# Altium PCB FINAL_Walkie_Talkie_POWER_PCB.PcbDoc
Units mil, origin at the board's own origin, x right, y up, seen from the top; angles counter-clockwise.
Board outline 2080 x 2303.15 mil, 4 copper layers (Top Layer, Battery-, Battery+, Bottom Layer), stack 23.756 mil thick; 39 components, 28 nets, 149 pads, 43 vias.
Unrouted connection lines stored in the file: 20.
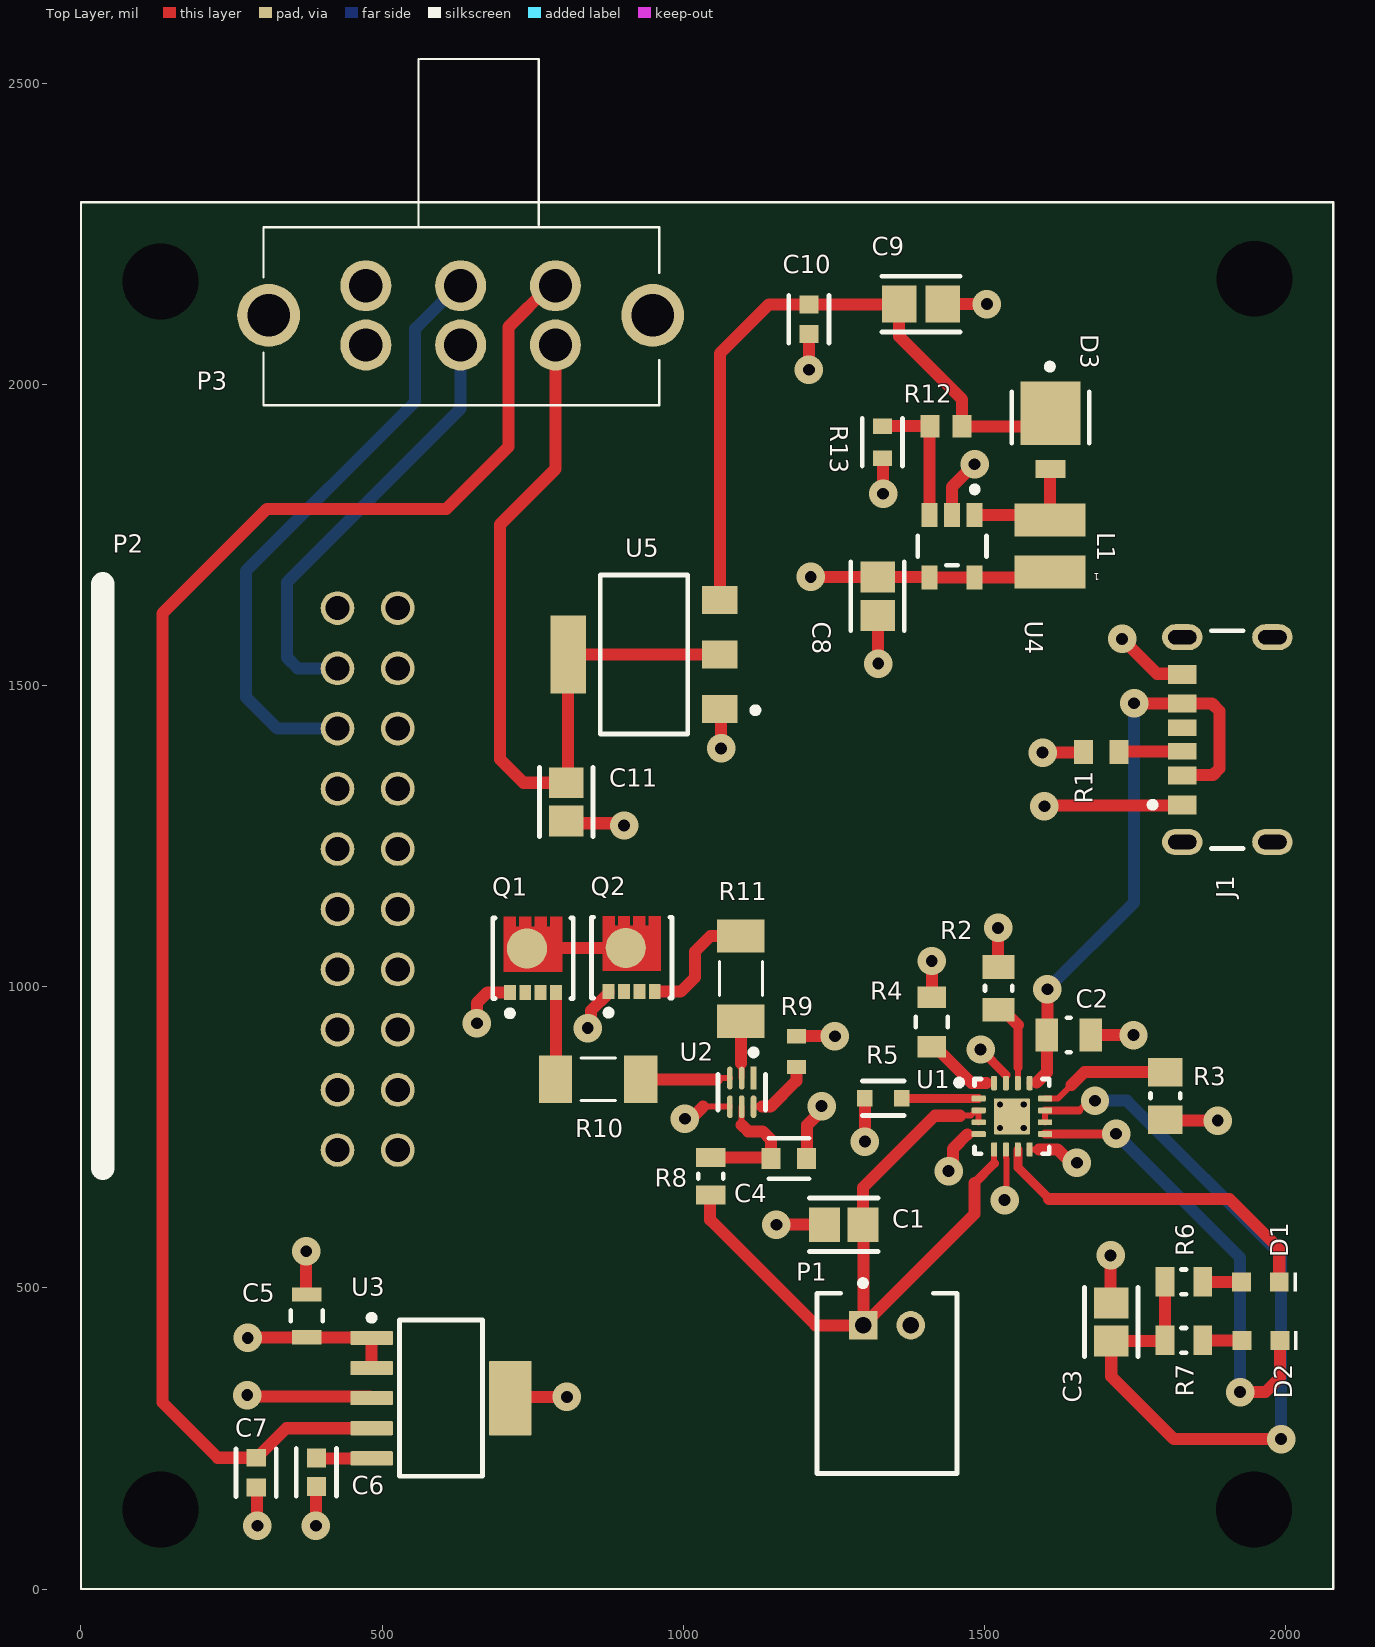
[diagram p0: Top Layer view]
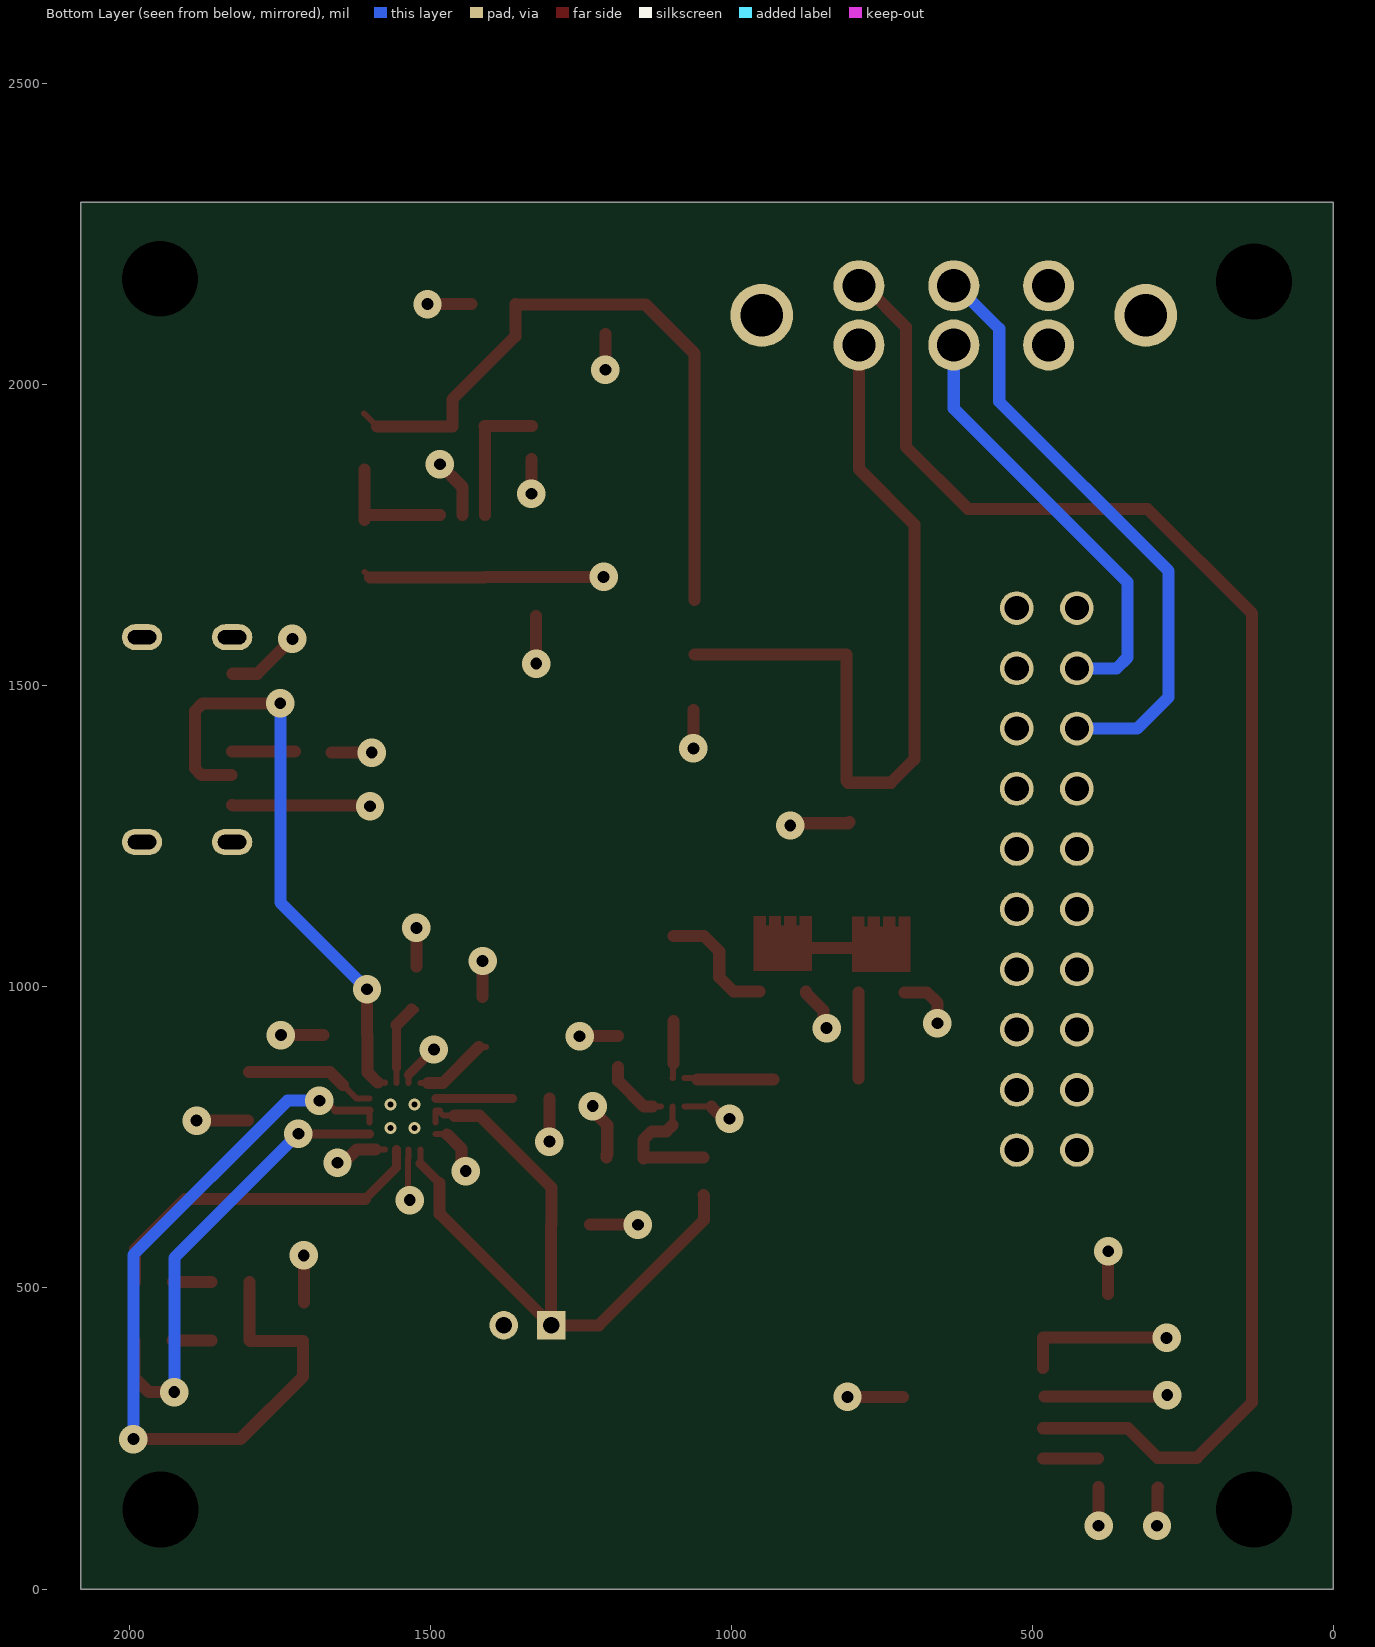
[diagram p1: Bottom Layer view, seen from below]
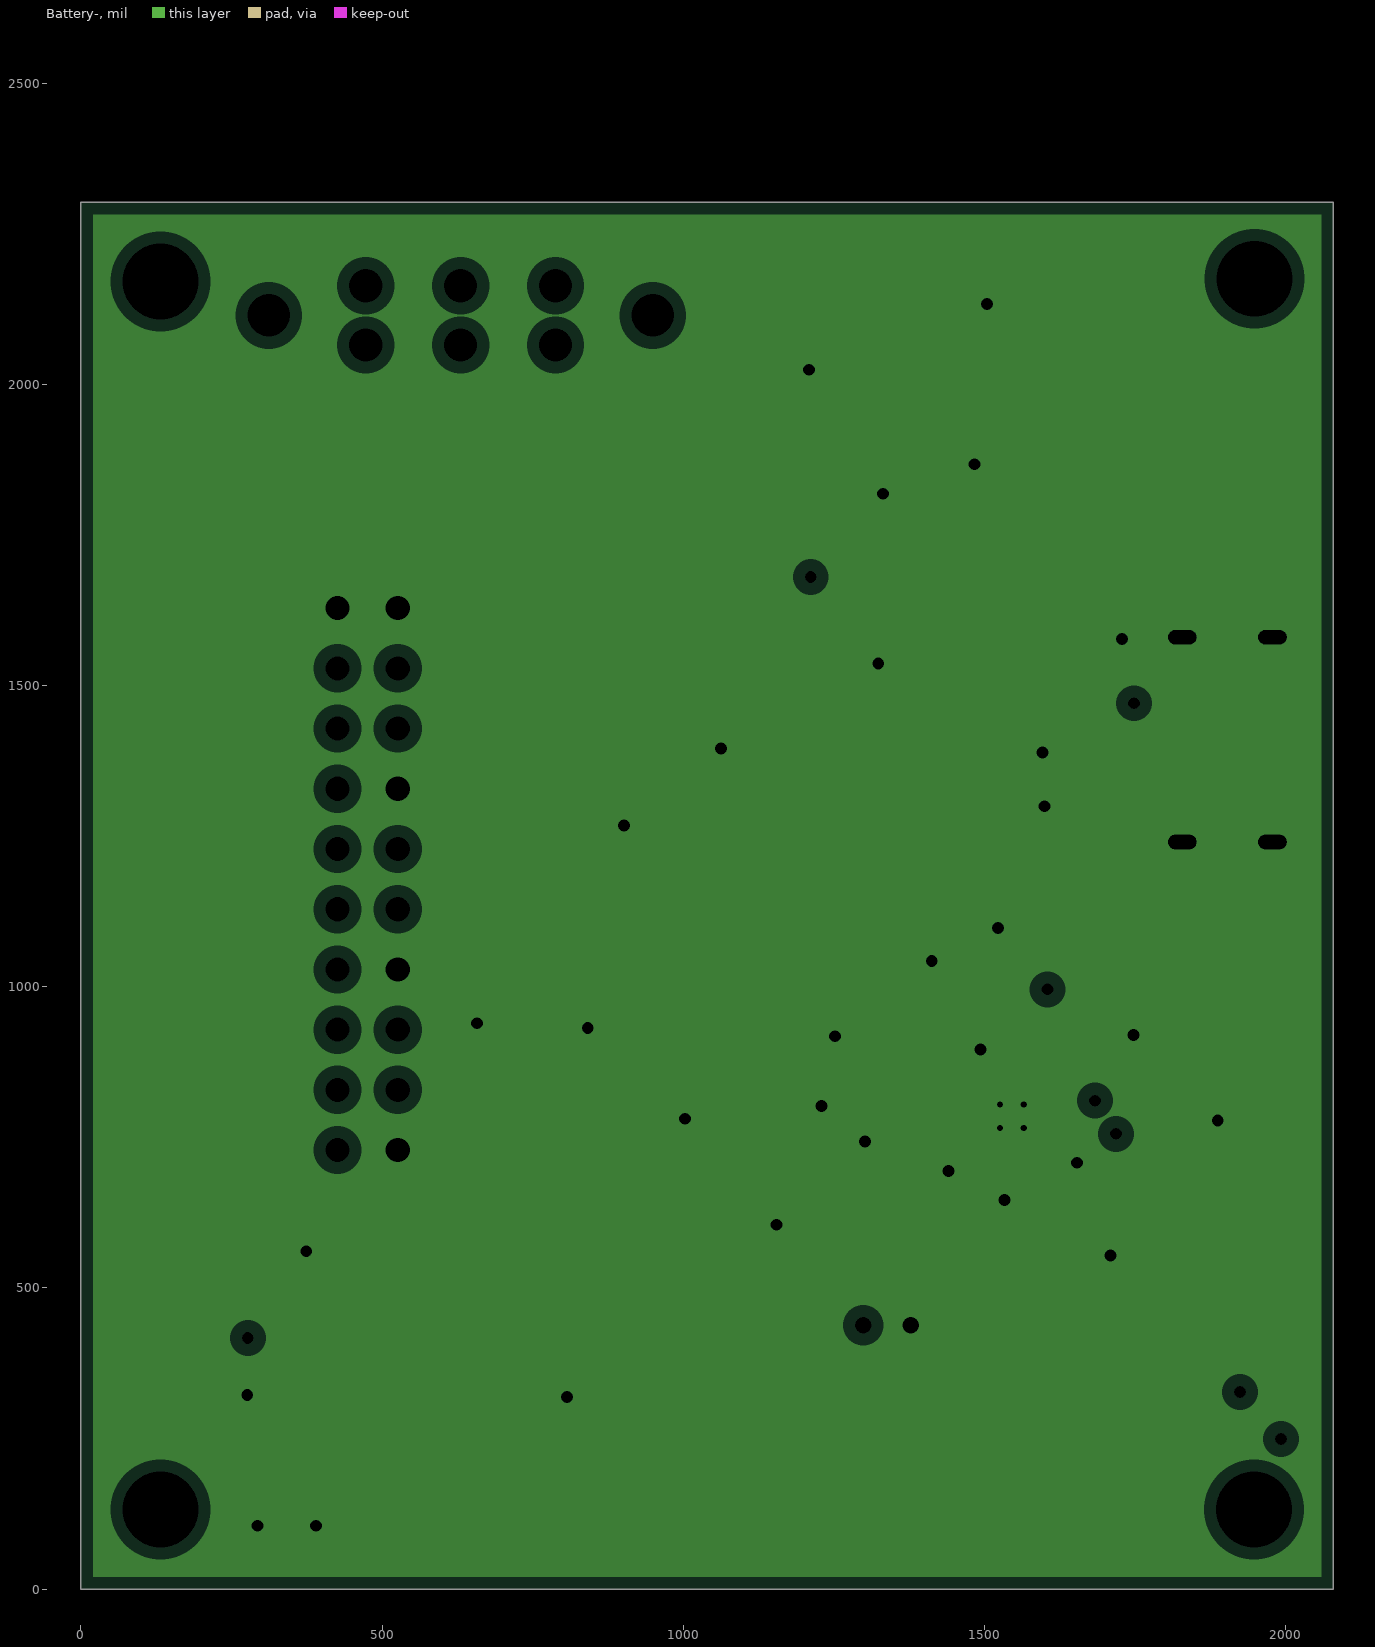
[diagram p2: Battery-, clearances drawn from the general rule]
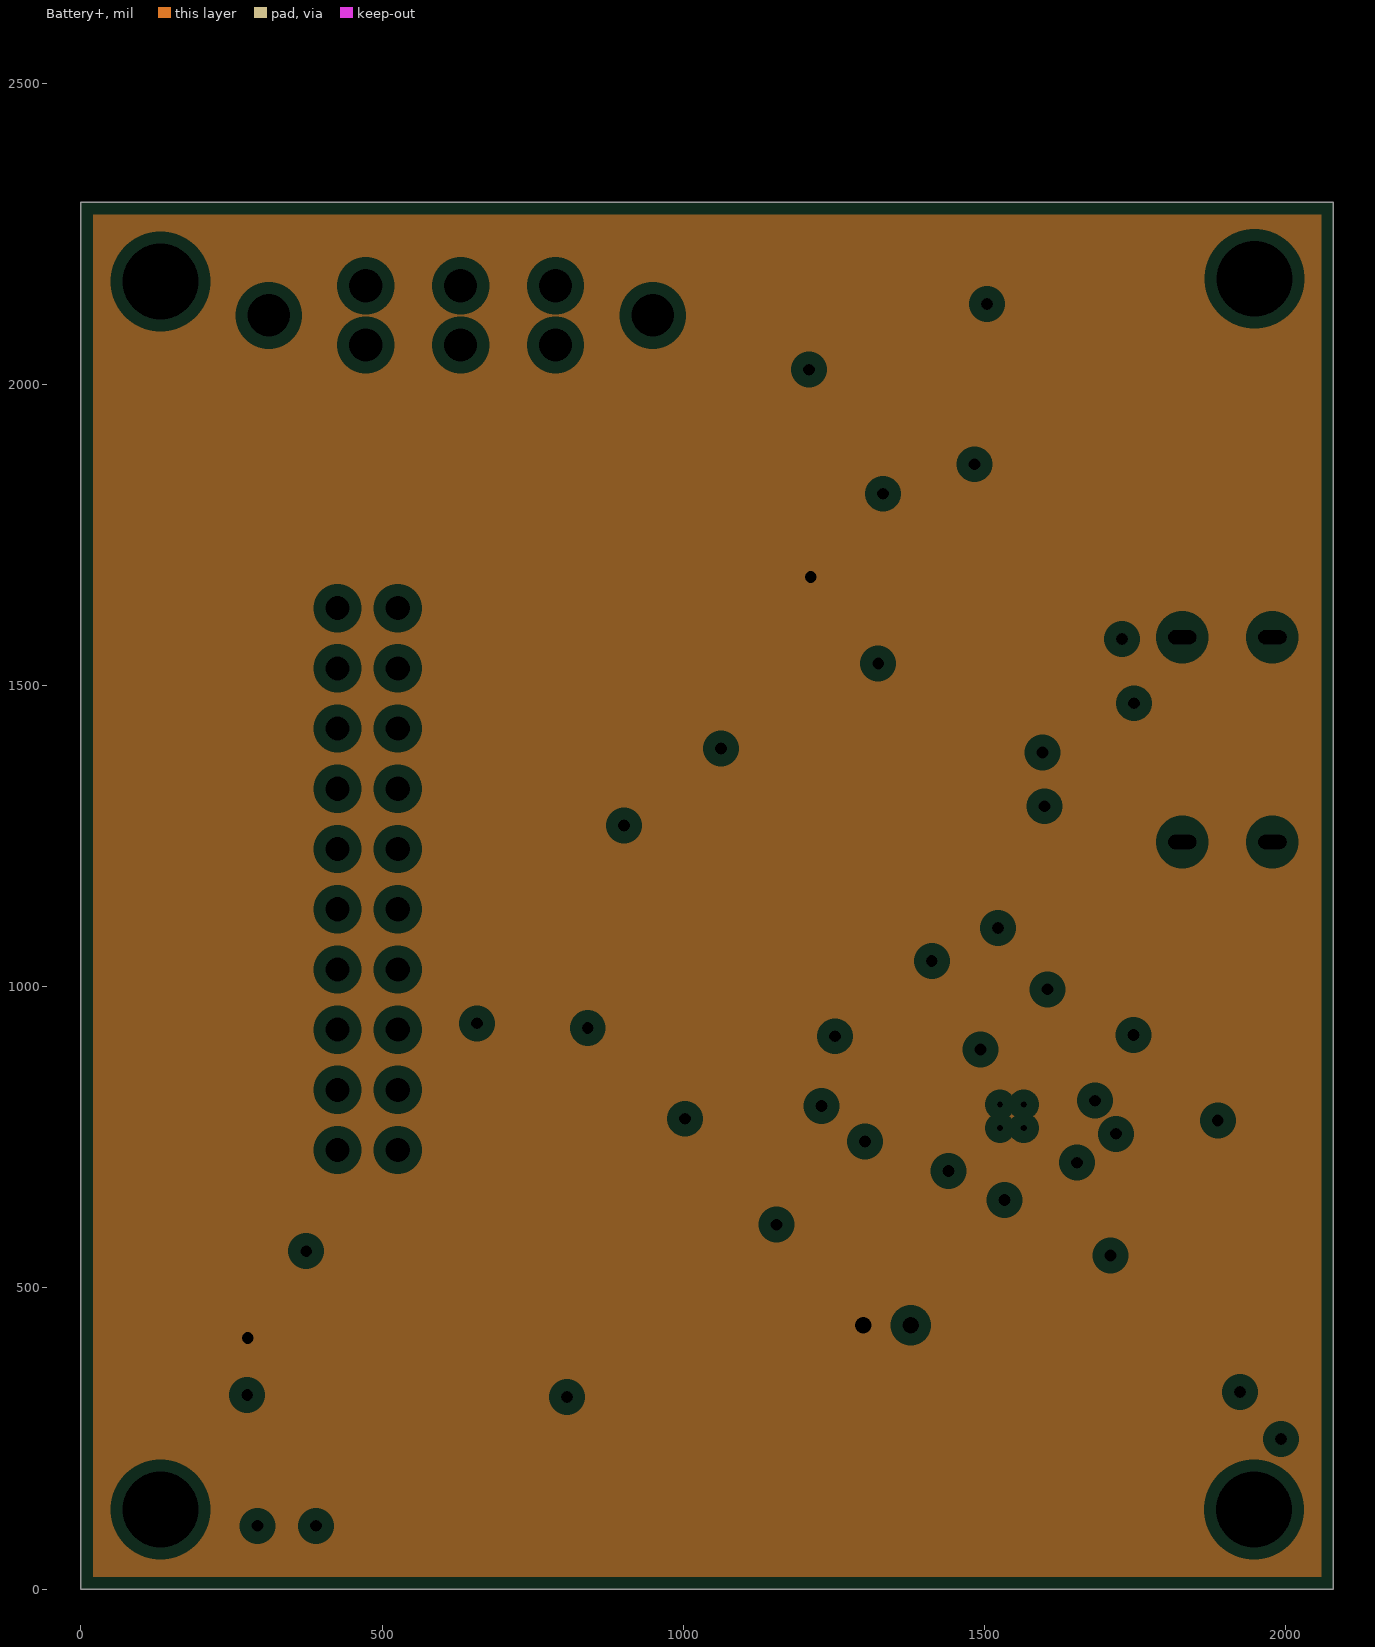
[diagram p3: Battery+, clearances drawn from the general rule]
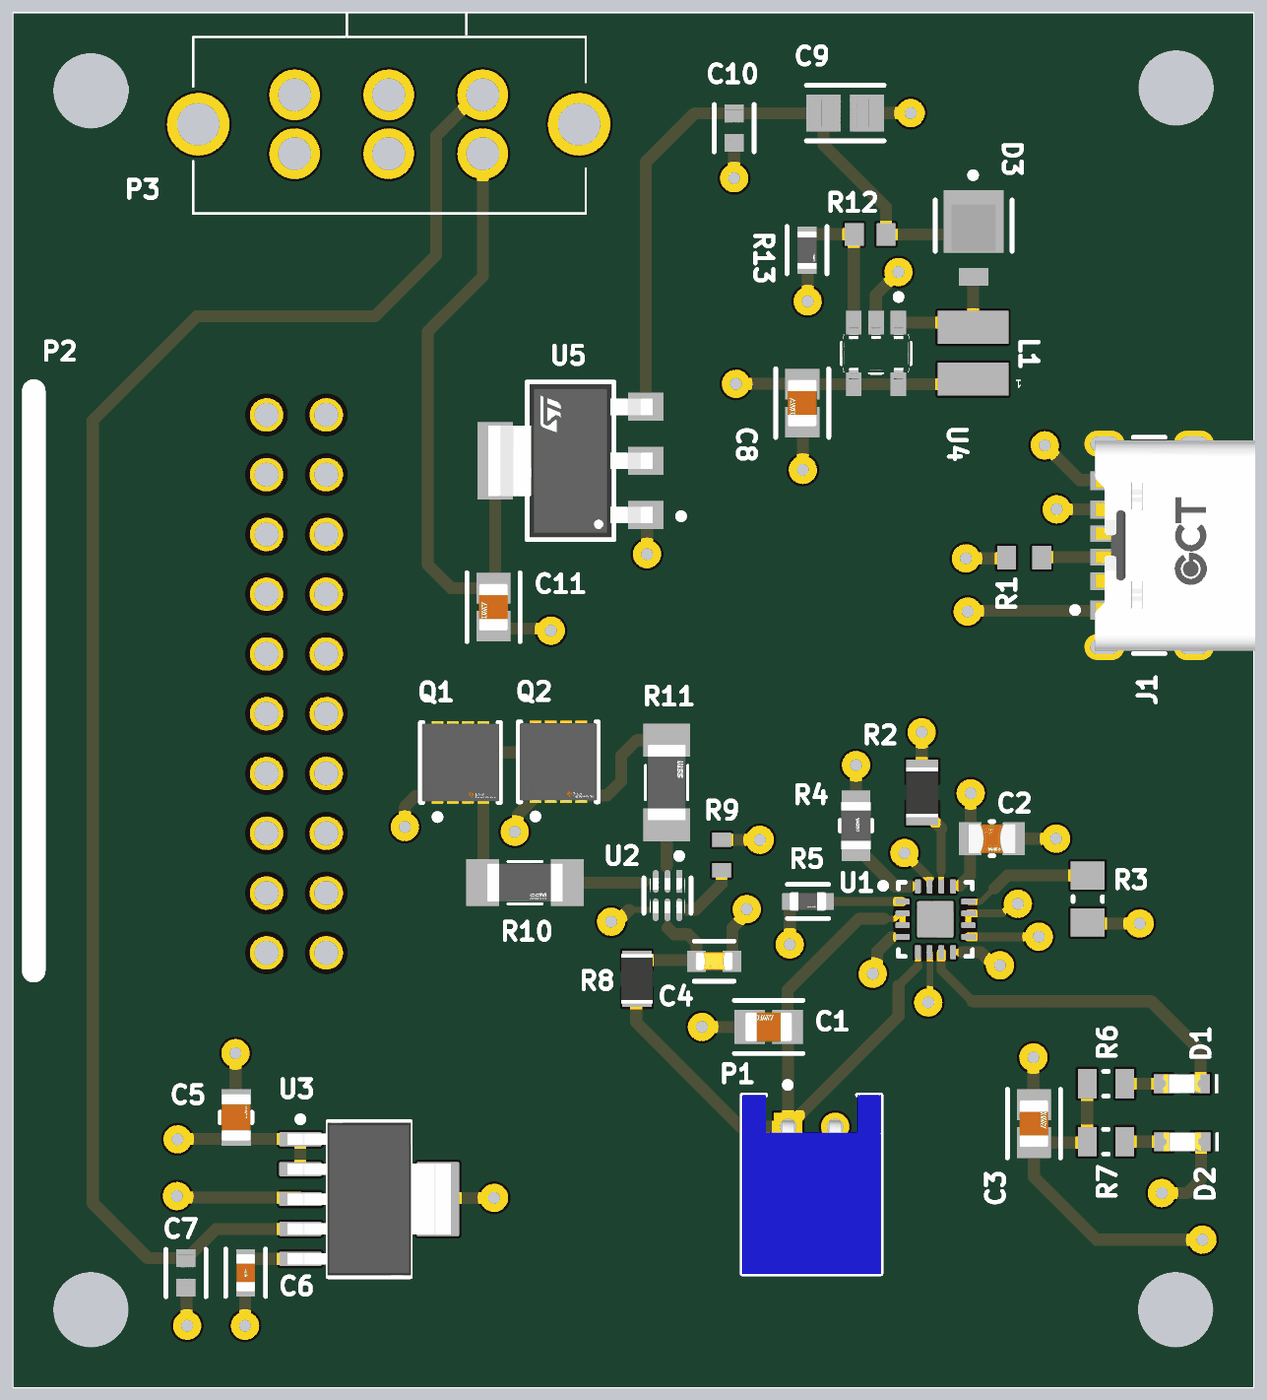
[diagram p4: 3D render of the assembled board from above, using the file's embedded part models]

## Layer stack, top to bottom
Top Solder: solder mask 0.4, Solder Resist, Dk 3.5
Top Layer: signal copper 1.4
Dielectric 2: prepreg 2.8, PP-006, Dk 4.1
Battery-: plane copper 1.378, net Battery-
Dielectric 1: dielectric 12.6, FR-4, Dk 4.8
Battery+: plane copper 1.378, net Battery+
Dielectric 3: prepreg 2.8, PP-006, Dk 4.1
Bottom Layer: signal copper 1.4
Bottom Solder: solder mask 0.4, Solder Resist, Dk 3.5

## Board outline
0,0 0,2303.15 2080,2303.15 2080,0

## Design rules (kind name [scope] priority, off if disabled: settings)
Clearance [All] p1: gap=5 ignorepadtopadclearanceinfootprint=FALSE
HoleSize [All] p1: absolutevalues=TRUE maxlimit=250 minlimit=10 maxpercent=80.000 minpercent=20.000
MinimumSolderMaskSliver [All] p1: minsoldermaskwidth=5
PlaneClearance [All] p1: clearance=20
PlaneConnect [All] p1: planeconnectstyle=Direct reliefexpansion=20 reliefentries=4 reliefconductorwidth=10 reliefairgap=10
PolygonConnect [All] p1: connectstyle=Relief reliefconductorwidth=10 reliefentries=4 polygonreliefangle="90 Angle" airgapwidth=10
RoutingVias [All] p1: holewidth=15 width=35 viastyle="Through Hole" minholewidth=10 minwidth=19 maxholewidth=28 maxwidth=50
SilkToSilkClearance [All] p1: silktosilkclearance=5
SilkToSolderMaskClearance [IsPad] p1: minsilkscreentomaskgap=5 clearancetoexposedcopper=TRUE
SolderMaskExpansion [All] p1: expansion=4 istentingtop=FALSE
SupplyNets "Schematic Supply Nets" [InNet('Battery-')] p1: voltage=0.000
Width [All] p1: maxlimit=1000 minlimit=5 preferedwidth=10
24 further rules are at their usual default settings.

## Components (designator, comment, footprint, x,y, rotation, side; value= is the part's Value field where it differs from the comment)
C1 "08056D475MAT2A" FP-0805-L_2_01_0_2-W_1_25-IPC_B 1266.72,605 r180 top
C2 "CC0805KKX7R7BB105" FP-CC0805-0_85-MFG 1640.58,920 r0 top value="1 uF"
C3 "08056D475MAT2A" FP-0805-L_2_01_0_2-W_1_25-IPC_B 1711,443.28 r90 top
C4 "CC0603KRX7R7BB104" FP-CC0603-DA-MFG 1175.53,715 r0 top value="100 nF"
C5 "GRM21BR61C106KE15K" FP-GRM21B-0_1-MFG 375,453.57 r90 top
C6 "0603B103K500CT" FP-0603B103K500CT-IPC_C 391,193.69 r270 top
C7 "CL10B105KP8NNNC" FP-CL10-IPC_C 291,193.32 r270 top
C8 "08056D475MAT2A" FP-0805-L_2_01_0_2-W_1_25-IPC_B 1323,1648.72 r270 top
C9 "CL21A226MQQNNNE" FP-CL21-IPC_A 1395,2134 r0 top
C10 "CL10B105KP8NNNC" FP-CL10-IPC_C 1209,2108.68 r270 top
C11 "08056D475MAT2A" FP-0805-L_2_01_0_2-W_1_25-IPC_B 806,1307.28 r270 top
D1 "150060GS75000" WL-SMCW_0603_150060xx75000 1958.5,510 r180 top
D2 "150060BS75000" WL-SMCW_0603_150060xx75000 1959.5,413 r180 top
D3 "MBRM140T3G" FP-457-04-MFG 1610,1940.51 r270 top
J1 "USB4125-GF-A-0190" FP-USB4125-GF-A-0190-MFG 1947.11,1410.68 r90 top
L1 "SDR0302-4R7ML" SDR0302-4R7ML 1609,1689 r180 top
P1 "S2B-PH-K-S(LF)(SN)" JST-S2B-PH-K-S_V 1338.63,341.54 r0 top
P2 "PH2RA-20-UA" PH2RA-20-UA 526,1629 r270 top
P3 "MFS201N-16-Z" MFS201N-16-Z 630.52,2066 r180 top
Q1 "CSD16406Q3" FP-DQG0008A-MFG 750.61,1047.5 r0 top
Q2 "CSD16406Q3" FP-DQG0008A-MFG 914.61,1048.5 r0 top
R1 "RC0603FR-075K1L" RESC1608X55X25ML10T15 1694.47,1390 r180 top
R2 "RC0805FR-0747KL" RESC2013X60X35NL10T20 1524,997.43 r270 top
R3 "RC0805FR-07887RL" RESC2013X60X35ML10T20 1801,819 r90 top
R4 "RC0805FR-07715RL" FP-RC0805-0_6-MFG 1413,941.66 r270 top
R5 "NCU18XH103F60RB" FP-NCU18-0_15-MFG 1332.49,815 r0 top
R6 "RC0805FR-071K5L" RESC2013X60X35LL10T20 1831.5,510 r180 top
R7 "RC0805FR-071K5L" RESC2013X60X35LL10T20 1831.5,413 r180 top
R8 "RC0805FR-07330RL" RESC2013X60X35LL10T20 1046,685.5 r270 top
R9 "RC0603FR-072K2L" RESC1608X55X25LL10T15 1188,892.59 r270 top
R10 "RG3216P-5004-B-T1" FP-RG3216-MFG 858.75,846.5 r0 top
R11 "RG3216P-5004-B-T1" FP-RG3216-MFG 1096,1013.87 r90 top
R12 "ERJ-3EKF3831V" RESC1608X55X30NL15T15 1436.57,1931 r0 top
R13 "RC0603FR-071KL" FP-RC0603-0_55-IPC_C 1331,1904.64 r270 top
U1 "BQ24072RGTR" BQ24072RGTR 1546,785 r180 top
U2 "BQ29700DSER" FP-DSE0006A-IPC_B 1097.32,824.76 r270 top
U3 "TPS79633DCQR" DCQ0006A_L 597.84,317 r0 top
U4 "MIC2288YD5-TR" FP-TSOT-5LD-PL-1-MFG 1446.6,1731.77 r270 top
U5 "LDL1117S50R" FP-SOT-223-0046067_14-MFG 935.02,1552 r180 top

## Footprints (in the part's own frame and the unit in brackets; to place one, negate y for a bottom-side part, rotate by r counter-clockwise, add the part's x,y. Pads: shape width x height; smd on the part's side, far side on the other; paste and mask are expansions set on the pad)
BQ24072RGTR [mm] "Battery Charger"
  rrect40% 0.6x0.25 smd: 1(1.4,-0.75) 2(1.4,-0.25) 3(1.4,0.25) 4(1.4,0.75) 9(-1.4,0.75) 10(-1.4,0.25) 11(-1.4,-0.25) 12(-1.4,-0.75)
  rrect40% 0.25x0.6 smd: 5(0.75,1.4) 6(0.25,1.4) 7(-0.25,1.4) 8(-0.75,1.4) 13(-0.75,-1.4) 14(-0.25,-1.4) 15(0.25,-1.4) 16(0.75,-1.4)
  rrect6% 1.522x1.522 smd paste-0.85: 17(0,0)
  rrect6% 1.55x1.55 on Top Paste: 17(0,0)
  silkscreen extent -1.57,-1.58 2.35,1.57, body extent -1.5,-1.5 1.5,1.5, height 1
DCQ0006A_L [mm] "SOT223, 6-Leads, Body 6.55x3.55mm, Pitch 1.27mm, IPC High Density"
  rrect17% 1.8x0.6 smd: 1(-2.925,2.54) 2(-2.925,1.27) 3(-2.925,0) 4(-2.925,-1.27) 5(-2.925,-2.54)
  rrect6% 1.8x3.15 smd: 6(2.925,0)
  silkscreen extent -3.05,-3.3 1.75,3.51, body extent -3.48,-3.25 3.48,3.25, height 1.64
FP-457-04-MFG [mm]
  rect 2.67x2.54 smd paste+0 mask+0: 1(-0.306,0)
  rect 0.762x1.27 smd paste+0 mask+0: 2(2.045,0)
  silkscreen extent -2.4,-1.64 0.96,1.64, body extent -1.74,-1.37 2.53,1.37, height 0.25
FP-0603B103K500CT-IPC_C [mil]
  rect 31.84x31.97 smd paste+0 mask+0: 1(-23.69,0) 2(23.69,0)
  silkscreen extent -40,-33 40,33, body extent -44,-22 44,22, height 10
FP-0805-L_2_01_0_2-W_1_25-IPC_B [mil]
  rect 51.36x57.33 smd paste+0 mask+0: 1(-31.72,0) 2(31.72,0)
  silkscreen extent -57,-44 57,44, body extent -67,-39 67,39, height 10
FP-CC0603-DA-MFG [mm]
  rect 0.8x0.9 smd paste+0 mask+0: 1(-0.75,0) 2(0.75,0)
  silkscreen extent -0.85,-0.85 0.85,0.85, body extent -1.35,-0.75 1.35,0.75, height 0.25
FP-CC0805-0_85-MFG [mm]
  rect 0.95x1.4 smd paste+0 mask+0: 1(-0.925,0) 2(0.925,0)
  silkscreen extent -0.08,-0.72 0.08,0.72, body extent -1.6,-1.05 1.6,1.05, height 0.25
FP-CL10-IPC_C [mil]
  rect 29.85x31.97 smd paste+0 mask+0: 1(-24.68,0) 2(24.68,0)
  silkscreen extent -40,-33 40,33, body extent -44,-22 44,22, height 10
FP-CL21-IPC_A [mil]
  rect 57.27x61.27 smd paste+0 mask+0: 1(-36.45,0) 2(36.45,0)
  silkscreen extent -65,-46 65,46, body extent -85,-50 85,50, height 10
FP-DQG0008A-MFG [mm]
  rect 0.5x0.63 smd paste-1000 mask+0: 1(-0.975,-1.435) 2(-0.325,-1.435) 3(0.325,-1.435) 4(0.975,-1.435)
  round 1.696 smd paste-1000 mask+0: 5-6-7-8(-0.25,0.415)
  Top Layer region: -1.225,-0.56 1.225,-0.56 1.225,1.75 0.725,1.75 0.725,1.34 0.575,1.34 0.575,1.75 0.075,1.75 0.075,1.34 -0.075,1.34 -0.075,1.75 -0.575,1.75 -0.575,1.34 -0.725,1.34 -0.725,1.75 -1.225,1.75 -1.225,-0.56
  silkscreen extent -1.7,-2.44 1.7,1.7, body extent -1.8,-1.85 1.8,1.85, height 0.25
FP-DSE0006A-IPC_B [mm]
  rect 0.965x0.242 smd paste+0 mask+0: 1(-0.604,0.5)
  rrect100% 0.965x0.242 smd paste+0 mask+0: 2(-0.604,0) 3(-0.604,-0.5) 4(0.604,-0.5) 5(0.604,0) 6(0.604,0.5)
  silkscreen extent -1.81,-1 0.75,1, body extent -1.34,-1 1.34,1, height 0.25
FP-GRM21B-0_1-MFG [mm]
  rect 0.6x1.25 smd paste+0 mask+0: 1(-0.9,0) 2(0.9,0)
  silkscreen extent -0.23,-0.67 0.23,0.67, body extent -1.3,-0.77 1.3,0.77, height 0.25
FP-NCU18-0_15-MFG [mm]
  rect 0.65x0.7 smd paste+0 mask+0: 1(-0.775,0) 2(0.775,0)
  silkscreen extent -0.87,-0.72 0.87,0.72, body extent -1.2,-0.58 1.2,0.58, height 0.25
FP-RC0603-0_55-IPC_C [mil]
  rect 25.93x31.97 smd paste+0 mask+0: 1(-26.64,0) 2(26.64,0)
  silkscreen extent -40,-33 40,33, body extent -44,-22 44,22, height 10
FP-RC0805-0_6-MFG [mm]
  rect 0.9x1.2 smd paste+0 mask+0: 1(-1.05,0) 2(1.05,0)
  silkscreen extent -0.23,-0.67 0.23,0.67, body extent -1.6,-0.77 1.6,0.77, height 0.25
FP-RG3216-MFG [mm]
  rect 1.4x2 smd paste+0 mask+0: 1(-1.8,0) 2(1.8,0)
  silkscreen extent -0.72,-0.9 0.72,0.9, body extent -2.6,-1.1 2.6,1.1, height 0.25
FP-SOT-223-0046067_14-MFG [mm]
  rect 1.5x1.2 smd paste+0 mask+0: 1(-3.2,2.3) 2(-3.2,0) 3(-3.2,-2.3)
  rect 1.5x3.3 smd paste+0 mask+0: 4(3.2,0)
  silkscreen extent -4.83,-3.35 1.85,3.35, body extent -4.05,-3.45 4.05,3.45, height 0.25
FP-TSOT-5LD-PL-1-MFG [mm]
  rect 1x0.66 smd paste+0 mask+0: 1(-1.315,0.95) 2(-1.315,0) 3(-1.315,-0.95) 4(1.315,-0.95) 5(1.315,0.95)
  silkscreen extent -2.52,-1.45 0.8,1.45, body extent -1.91,-1.55 1.91,1.55, height 0.25
FP-USB4125-GF-A-0190-MFG [mm]
  rrect100% 1.1x1.7 hole 1.2 slot 0.6 at 0 deg paste-2539.97 mask+0: 1(-4.32,3) 2(4.32,3) 3(-4.32,-0.8) 4(4.32,-0.8)
  rect 0.7x1.2 smd paste+0 mask+0: A5(-0.5,3) B5(0.5,3)
  rect 0.76x1.2 smd paste+0 mask+0: A9(1.52,3) B9(-1.52,3)
  rect 0.8x1.2 smd paste+0 mask+0: A12(2.75,3) B12(-2.75,3)
  silkscreen extent -4.59,0.43 4.59,4.37, body extent -4.97,-3.57 4.97,3.95, height 0.25
JST-S2B-PH-K-S_V [mm] "THD, 2-Leads, Body 7.6x5.9mm, Pitch 2mm"
  rect 1.2x1.2 hole 0.7: 1(-1,2.45)
  round 1.2 hole 0.7: 2(1,2.45)
  silkscreen extent -2.95,-3.8 2.95,4.35, body extent -2.95,-3.8 2.95,3.8, height 4.8
MFS201N-16-Z [mm] "Slide Switch Right Angle"
  round 2.15 hole 1.4: 1(-4,-2.5) 2(0,-2.5) 3(4,-2.5) 4(-4,0) 5(0,0) 6(4,0)
  round 2.65 hole 1.8: 7(8.1,-1.25) 8(-8.1,-1.25)
  silkscreen extent -8.38,-12.06 8.32,2.54
PH2RA-20-UA [mm] "20-pin Board to Board Connector"
  round 1.42 hole 1.02 mask+0.2: 1(0,-2.54) 2(0,0) 3(2.54,-2.54) 4(2.54,0) 5(5.08,-2.54) 6(5.08,0) 7(7.62,-2.54) 8(7.62,0) 9(10.16,-2.54) 10(10.16,0) 11(12.7,-2.54) 12(12.7,0) 13(15.24,-2.54) 14(15.24,0) 15(17.78,-2.54) 16(17.78,0) 17(20.32,-2.54) 18(20.32,0) 19(22.86,-2.54) 20(22.86,0)
  silkscreen extent -1.02,-12.44 23.62,-12.44
RESC1608X55X25LL10T15 [mm] "Chip Resistor, 2-Leads, Body 1.60x0.80mm, IPC High Density"
  rect 0.6x0.8 smd: 1(-0.65,0) 2(0.65,0)
  body extent -0.85,-0.45 0.85,0.45, height 0.55
RESC1608X55X25ML10T15 [mm] "Chip Resistor, 2-Leads, Body 1.60x0.80mm, IPC Low Density"
  rect 0.8x1 smd: 1(-0.75,0) 2(0.75,0)
  body extent -0.85,-0.45 0.85,0.45, height 0.55
RESC1608X55X30NL15T15 [mm] "Chip Resistor, 2-Leads, Body 1.60x0.80mm, IPC Medium Density"
  rect 0.8x0.95 smd: 1(-0.675,0) 2(0.675,0)
  body extent -0.87,-0.48 0.87,0.48, height 0.55
RESC2013X60X35LL10T20 [mm]
  rect 0.8x1.25 smd: 1(-0.8,0) 2(0.8,0)
  silkscreen extent -0.1,-0.53 0.1,0.53, body extent -1.05,-0.67 1.05,0.67, height 0.6
RESC2013X60X35ML10T20 [mm] "Chip Resistor, 2-Leads, Body 2.00x1.25mm, IPC Low Density"
  rect 1.2x1.45 smd: 1(-1,0) 2(1,0)
  silkscreen extent -0.1,-0.63 0.1,0.63, body extent -1.05,-0.67 1.05,0.67, height 0.6
RESC2013X60X35NL10T20 [mm] "Chip Resistor, 2-Leads, Body 2.1x1.35mm, IPC Medium Density"
  rect 1x1.35 smd: 1(-0.9,0) 2(0.9,0)
  silkscreen extent -0.1,-0.58 0.1,0.58, body extent -1.05,-0.68 1.05,0.67, height 0.6
SDR0302-4R7ML [mm] "4.7uH Inductor"
  rect 3x1.4 smd: 1(0,0) 2(0,-2.2)
WL-SMCW_0603_150060xx75000 [mm] "SMD Mono-color Chip LED, body 1.60 x 0.80 mm"
  rect 0.8x0.8 smd: 1(-0.8,0) 2(0.8,0)
  silkscreen extent -1.55,-0.4 -1.4,0.4, body extent -0.8,-0.4 0.8,0.4, height 0.7

## Part data
C1 C3 C8 C11: library part CMP-2007-04650-2, "General Purpose Ceramic Capacitor, 0805, 4.7uF, 20%, X5R, 15%, 6.3V", Capacitance=4.7uF, Case Code (Imperial)=0805, Case Code (Metric)=2012, Dielectric=X5R, Max Operating Temperature=85°C, Min Operating Temperature=-55°C, Package Quantity=1, Tolerance=20%, Voltage Rating=6.3V, Case/Package=0805, Construction=Flat, Depth=1.25mm, Height=1.4mm, Lead Free="Lead Free", Length=2.01mm, Mount="Surface Mount", Number of Pins=2, Packaging="Tape and Reel", Radiation Hardening=No, RoHS Compliant=Yes, Series=-, Termination=SMD/SMT, Thickness=0.055inch, Voltage Rating (DC)=6.3V, Width=0.049inch
C2: library part CMP-03422-000001-1, "CAP CER 1UF 16V X7R 0805", Capacitance="1 uF", Manufacturer=Yageo, Package=CC0805-0.85, Temperature="-30°C to +85°C", Temperature Characteristic=X7R, Temperature Range High=+85°C, Temperature Range Low=-30°C, Tolerance=0.1, Voltage Rating="16 V", Automotive=No, Category=Cap, ComponentLink2Description=Datasheet, ComponentLink2URL=http://www.yageo.com/documents/recent/UPY-GPHC_Y5V_6.3V-to-50V_8.pdf, Device Class L1="Passive Components", Device Class L2=Capacitors, Device Class L3="Ceramic Capacitors", Digikey Description="CAP CER 1UF 16V X7R 0805", Footprint Url=http://www.yageo.com/exep/pages/download/literatures/UPY-C_GEN_24.pdf, Height=0.95mm, Ipc Land Pattern Name=CAPC200125X85, Lead Free=Yes, Manufacturer Part Number=CC0805KKX7R7BB105, Material=Ceramic, Mouser Description="Multilayer Ceramic Capacitors MLCC - SMD/SMT 1.0uF 16V X7R 10%", Octopart=https://octopart.com/cc0805kkx7r7bb105-yageo-8376555, RoHS=TRUE
C4: library part CMP-2000-05002-2, "CAP CER 0.1UF 16V X7R 0603", Capacitance="100 nF", Manufacturer=YAGEO, Package=CC0603-DA, Temperature="-55°C to +125°C", Temperature Characteristic=X7R, Temperature Coefficient=15%, Temperature Range High=+125°C, Temperature Range Low=-55°C, Tolerance=0.1, Voltage="16 V", Automotive=No, Category=Cap, ComponentLink2Description=Datasheet, ComponentLink2URL=http://www.yageo.com/documents/recent/UPY-GPHC_X7R_6.3V-to-50V_18.pdf, Device Class L1="Passive Components", Device Class L2=Capacitors, Device Class L3="Ceramic Capacitors", Digikey Description="CAP CER 0.1UF 16V X7R 0603", Footprint Url=http://www.yageo.com/exep/pages/download/literatures/UPY-C_GEN_24.pdf, Height=0.9mm, Lead Free=Yes, Manufacturer Part Number=CC0603KRX7R7BB104, Material=Ceramic, Mouser Description="Multilayer Ceramic Capacitor, CC Series, 0.1 - F, - 10%, X7R, 16 V, 0603 [1608 Metric]", Octopart=https://octopart.com/cc0603krx7r7bb104-yageo-192941, RoHS=TRUE, Voltage Rating="16 V"
C5: library part CMP-2007-03534-2, "Chip Multilayer Ceramic Capacitors for General Purpose, 0805, 10uF, X5R, 15%, 10%, 16V", Capacitance=10uF, Case Code (Imperial)=0805, Case Code (Metric)=2012, Dielectric=X5R, Max Operating Temperature=85°C, Min Operating Temperature=-55°C, Package Quantity=10000, Tolerance=10%, Voltage=16V, Case/Package=0805, Depth=1.25mm, Height=1.25mm, Length=2mm, Mount="Surface Mount", Packaging="Tape and Reel", Radiation Hardening=No, REACH SVHC="No SVHC", Termination=SMD/SMT, Thickness=0.053inch, Voltage Rating=16V, Voltage Rating (DC)=16V, Width=0.049inch
C6: library part CMP-45632-000011-1, "CAP CER 10000PF 50V X7R 0603", Capacitance=0.01uF, Case Code (Imperial)=0603, Case Code (Metric)=1608, Dielectric=X7R, Insulation Resistance=10GR, Max Operating Temperature=125°C, Min Operating Temperature=-55°C, Package Quantity=4000, Tolerance=10%, Voltage Rating=50V, Case/Package=0603, Depth=0.8mm, Dissipation Factor=2.5%, Height=0.8mm, Lead Free="Lead Free", Length=1.6mm, Packaging="Tape and Reel", Radiation Hardening=No, RoHS Compliant=Yes, Series=-, Termination=SMD/SMT, Voltage Rating (DC)=50V, Width=0.8mm
C7 C10: library part CMP-2000-06094-2, "Cap Ceramic 1uF 10V X7R ±10% Pad SMD 0603 +125°C T/R", Capacitance=1uF, Case Code (Imperial)=0603, Case Code (Metric)=1608, Dielectric=X7R, Max Operating Temperature=125°C, Min Operating Temperature=-55°C, Package Quantity=1, Tolerance=10%, Voltage Rating=10V, Case/Package=0603, Contact Plating=Tin, Depth=0.8mm, Height=0.8mm, Lead Free="Lead Free", Length=1.6mm, Mount="Surface Mount", Packaging="Tape and Reel", Radiation Hardening=No, Thickness=0.035inch, Voltage Rating (DC)=10V, Width=0.031inch
C9: library part CMP-13271-000185-1, "CL21 Series 0805 22uF 6.3V ±20% Tolerance X5R Multilayer Ceramic Chip Capacitor", Capacitance=22uF, Case Code (Imperial)=0805, Case Code (Metric)=2012, Dielectric=X5R, Max Operating Temperature=85°C, Min Operating Temperature=-55°C, Package Quantity=2000, Tolerance=20%, Voltage Rating=6.3V, Case/Package=0805, Contact Plating=Tin, Depth=1.25mm, Height=1.25mm, Lead Free="Lead Free", Length=2mm, Mount="Surface Mount", Packaging="Tape and Reel", Radiation Hardening=No, Thickness=0.055inch, Voltage Rating (DC)=6.3V, Width=0.049inch
D1: library part CMP-1426-00002-4, "430mcd Colorless transparence 520nm Emerald 140° LED0603 Light Emitting Diodes (LED) ROHS", Case Code (Imperial)=0603, Case Code (Metric)=1608, Color=Green, Forward Current=100mA, Forward Voltage=3.2V, Max Junction Temperature (Tj)=95°C, Max Operating Temperature=85°C, Max Reverse Voltage (DC)=5V, Min Operating Temperature=-40°C, Output Current=10µA, Power Dissipation=105mW, Test Current=20mA, Case/Package=0603, Dominant Wavelength=525nm, Height=700µm, Lead Free="Lead Free", Length=1.6mm, Lens Style="Clear, Rectangular", Luminous Intensity=430mcd, Mount="Surface Mount", Packaging="Tape and Reel", Peak Wavelength=515nm, REACH SVHC=Unknown, Reverse Voltage=5V, RoHS=Compliant, Viewing Angle=140°, Wavelength=525nm, Width=800µm
D2: library part CMP-1426-00003-4, "Led, Blue, 470 Nm, 3.2 V, 30 Ma, 145 Mcd Rohs Compliant: Yes", Case Code (Imperial)=0603, Case Code (Metric)=1608, Color=Blue, Forward Current=100mA, Forward Voltage=3.2V, Max Junction Temperature (Tj)=95°C, Max Operating Temperature=85°C, Max Reverse Voltage (DC)=5V, Min Operating Temperature=-40°C, Power Dissipation=105mW, Test Current=20mA, Case/Package=0603, Dominant Wavelength=470nm, Height=700µm, Length=1.6mm, Lens Style="Clear, Rectangular", Luminous Intensity=145mcd, Mount="Surface Mount", Packaging="Tape and Reel", Peak Wavelength=465nm, REACH SVHC=Unknown, Reverse Voltage=5V, RoHS=Compliant, Viewing Angle=140°, Wavelength=470nm, Width=800µm
D3: library part CMP-1055-00293-2, "DIODE SCHOTTKY 40V 1A POWERMITE", Average Rectified Current=1A, Case/Package=457, Forward Voltage=550mV, Max Forward Surge Current (Ifsm)=50A, Max Operating Temperature=125°C, Max Repetitive Reverse Voltage (Vrrm)=40V, Max Reverse Leakage Current=500uA, Min Operating Temperature=-55°C, Package Quantity=1, Contact Plating=Tin, Current Rating=1A, Element Configuration=Single, Forward Current=1A, Halogen Free="Halogen Free", Height=1.15mm, Lead Free="Lead Free", Length=2.05mm, Max Reverse Voltage (DC)=40V, Max Surge Current=50A, Number of Pins=2, Output Current=1A, Packaging="Tape and Reel", Peak Non-Repetitive Surge Current=50A, Peak Reverse Current=500uA, Polarity=Standard, Radiation Hardening=No, REACH SVHC="No SVHC", Voltage Rating (DC)=40V, Width=2.18mm
J1: library part CMP-245163-000004-1, "CONN RCPT TYPE C 6P SMD RA"
P1: library part CMP-1755-00004-1, "Male Header, Pitch 2 mm, 1 x 2 Position, Height 4.8 mm, Tail Length 3.4 mm, -25 to 85 degC, RoHS, Bulk", Capacitance="10 uF", Case\Package=Radial, Max Operating Temperature="85 degC", Min Operating Temperature="-40 degC", Package Quantity=200, Tolerance=20%, Voltage Rating="50 V", ComponentLink1Description=Datasheet, ComponentLink1URL=http://www.jst-mfg.com/product/pdf/eng/ePH.pdf, DatasheetVersion=Dec-12, Diameter="5 mm", Height="11 mm", Lead Pitch="2 mm", Length="11 mm", Mount="Through Hole", PackageDescription="Male Header, Pitch 2 mm, 1 x 2 Position, Height 4.8 mm, Tail Length 3.4 mm", PackageReference=S2B-PH-K-S, Packaging=Bulk, Pins=2, Radiation Hardening=No, REACH SVHC="No SVHC", RoHSCompliant=true, Voltage Rating (DC)="50 V"
P3: "Slide Switch Right Angle"
Q1 Q2: library part CMP-04962-000044-1, "MOSFET N-CH 25V 60A 8-SON", Case/Package=SON, Continuous Drain Current (ID)=60A, Drain to Source Breakdown Voltage=25V, Gate to Source Voltage (Vgs)=16V, Input Capacitance=1.1nF, Max Operating Temperature=150°C, Max Power Dissipation=2.7W, Min Operating Temperature=-55°C, Package Quantity=1, Threshold Voltage=1.7V, Contact Plating=Tin, Drain to Source Voltage (Vdss)=25V, Dual Supply Voltage=25V, Element Configuration=Single, Fall Time=4.8ns, Lead Free="Contains Lead", Mount="Surface Mount", Nominal Vgs=1.7V, Number of Elements=1, Number of Pins=8, Packaging="Tape and Reel", Polarity=N-CHANNEL, Power Dissipation=2.7W, Radiation Hardening=No, Rds On Max=5.3mR, REACH SVHC="No SVHC", Rise Time=12.9ns, RoHS Compliant=Yes, Series=NexFET™, Termination=SMD/SMT, Turn-Off Delay Time=8.5ns, Turn-On Delay Time=7.3ns
R1: library part CMP-2000-04091-1, Manufacturer=Yageo, Part Number=RC0603FR-075K1L
R2: library part CMP-1659-00011-4, "Chip Resistor, 47 KOhm, +/- 1%, 0.125 W, -55 to 155 degC, 0805 (2012 Metric), RoHS, Tape and Reel", Manufacturer=Yageo, Max Operating Temperature="155 degC", Min Operating Temperature="-55 degC", Package Quantity=200, Voltage Rating="150 V", ComponentLink1Description="Manufacturer URL", ComponentLink1URL=http://www.yageo.com/, ComponentLink2Description=Datasheet, ComponentLink2URL=http://www.yageo.com/documents/recent/PYu-RC_Group_51_RoHS_L_04.pdf, DatasheetVersion="Rev. 4, 02/2016", Height="0.5 mm", Length="2 mm", Mount="Surface Mount", Mounting Technology="Surface Mount", PackageDescription="2-Pin Surface Mounted Device, Body 2 x 1.25 mm", PackageReference=0805, Packaging="Tape and Reel", Pins=2, REACH SVHC="No SVHC", RoHSCompliant=true
R3: library part CMP-2001-01292-1, Manufacturer=Yageo, Part Number=RC0805FR-07887RL
R4: library part CMP-2001-01257-3, "RES 715 OHM 1% 1/8W 0805", Case Code (Imperial)=0805, Case Code (Metric)=2012, Max Operating Temperature=155°C, Max Power Dissipation=125mW, Min Operating Temperature=-55°C, Package Quantity=1, Resistance=715, Resistor Type="Thick Film", Temperature Coefficient=100ppm/°C, Tolerance=1%, Voltage Rating=150V, Case/Package=0805, Construction=Rectangular, Contact Plating=Tin, Depth=1.25mm, Features="Moisture Resistant", Height=0.024inch, Lead Free="Lead Free", Length=0.079inch, Military Standard=Not, Number of Terminations=2, Packaging="Tape and Reel", Power Rating=125mW, Radiation Hardening=No, RoHS Compliant=Yes, Series=RC, Size Code=0805, Termination=SMD/SMT, Voltage Rating (DC)=150V, Width=0.049inch
R5: library part CMP-06022-000443-2, "THERMISTOR NTC", Case Code (Imperial)=0603, Case Code (Metric)=1608, Max Operating Temperature=125°C, Min Operating Temperature=-40°C, Case/Package=0603, REACH SVHC="No SVHC", RoHS Compliant=Yes
R6 R7: library part CMP-1659-00010-2, "RES 1.50K OHM 1/8W 1% 0805 SMD", Manufacturer=Yageo, ComponentLink1Description=Datasheet, ComponentLink1URL=http://www.yageo.com/documents/recent/PYu-RC_Group_51_RoHS_L_04.pdf, PackageReference=0805, PartNumber=RC0805FR-071K5L
R8: library part CMP-2000-06960-1, "Chip Resistor, 330 Ohm, +/- 1%, 125 mW, -55 to 155 degC, 0805 (2012 Metric), RoHS, Tape and Reel", Case Code - in=0805, Case Code - mm=2012, Manufacturer=Yageo, Operating Temperature Range=-55Cto+155C, Package Description="2-Pin Surface Mounted Device, Body 2 x 1.25 mm", Power Rating=125mW(1/8W), Resistance=330, Temperature Coefficient=100PPM/C, Tolerance=1%, Voltage Rating=150V, Datasheet URL=http://www.yageo.com/documents/recent/PYu-RC_Group_51_RoHS_L_7.pdf, Datasheet Version="Rev. 7, 05/2017", Manufacturer URL=http://www.yageo.com/, Mounting Technology=SurfaceMount, Package Reference=0805, Packaging=Reel, Product=ThickFilmResistorsGeneralPurpose, Series=RC, Termination Style=SMD/SMT
R9: library part CMP-2000-06934-1, "Thick Film Resistor, 2.2 KOhm, 100 mW, 50 V, +/- 1%, -55 to 155 degC, 2-Pin SMD (0603), RoHS, Tape and Reel", Case Code - in=0603, Case Code - mm=1608, Manufacturer=Yageo, Operating Temperature Range=-55Cto+155C, Package Description="2-Pin Surface Mount Device, Body 1.6 x 0.8 mm", Power Rating=100mW, Resistance=2.2k, Temperature Coefficient=100PPM/C, Tolerance=1%, Voltage Rating=50V, Datasheet URL=http://www.yageo.com/documents/recent/PYu-RC_Group_51_RoHS_L_7.pdf, Datasheet Version="Rev. 7, 05/2017", Manufacturer URL=http://www.yageo.com/, Mounting Technology=SurfaceMount, Package Reference=0603, Packaging=Reel, Product=ThickFilmResistorsGeneralPurpose, Series=RC, Termination Style=SMD/SMT
R10 R11: library part CMP-00597-81680123-1, "Fixed Resistor, Thin Film, 0.25W, 5000000ohm, 200V, 0.1% +/-Tol, 25ppm/Cel, Surface Mount, 1206", Case Code (Metric)=3216, Case/Package=1206, Max Operating Temperature=155°C, Min Operating Temperature=-55°C, Power Rating=250mW, Resistance=5M, Temperature Coefficient=25ppm/°C, Tolerance=0.1%, Voltage Rating=200V, Composition="Thin Film", Height=500µm, Lead Free="Lead Free", RoHS=Non-Compliant, Voltage Rating (DC)=200V
R12: library part CMP-2000-00471-1, Manufacturer=Panasonic, Part Number=ERJ-3EKF3831V
R13: library part CMP-1659-00009-5, "RES 1K OHM 1% 1/10W 0603", Case Code (Imperial)=0603, Case Code (Metric)=1608, Max Operating Temperature=155°C, Max Power Dissipation=100mW, Min Operating Temperature=-55°C, Resistance=1k, Resistance Tolerance=1%, Resistor Type="Thick Film", Temperature Coefficient=100ppm/°C, Voltage Rating=50V, Case/Package=0603, Construction=Rectangular, Contact Plating=Tin, Depth=0.8mm, Features="Moisture Resistant", Height=0.45mm, Lead Free="Lead Free", Length=1.6mm, Military Standard=Not, Number of Terminations=2, Packaging="Tape and Reel", Power Rating=100mW, Radiation Hardening=No, REACH SVHC="No SVHC", RoHS Compliant=Yes, Series=RC, Size Code=0603, Technology="THICK FILM", Termination=SMD/SMT, Tolerance=1%
U1: "IC BATT CHG LI-ION 1CELL 16QFN"
U2: library part CMP-04911-000043-1, "IC LITHIUM BATT PROTECT 6-SON", Max Operating Temperature=85°C, Min Operating Temperature=-40°C, Operating Supply Voltage=8V, Package Quantity=3000, Contact Plating=Gold, Fault Protection="Over Current", Lead Free="Lead Free", Mount="Surface Mount", Number of Cells=1, Number of Pins=6, Packaging="Tape and Reel", RoHS Compliant=Yes, Weight=0.000342oz
U3: library part CMP-0395-00327-2, "Single Output High PSRR LDO, 1 A, Fixed 3.3 V Output, 2.7 to 5.5 V Input, 6-pin SOT-223 (DCQ), -40 to 125 degC, Green (RoHS & no Sb/Br)", Manufacturer="Texas Instruments", Accuracy(%)=2, ComponentLink1Description="Manufacturer URL", ComponentLink1URL=http://www.ti.com/, ComponentLink2Description=Datasheet, ComponentLink2URL=http://www.ti.com/general/docs/lit/getliterature.tsp?genericPartNumber=TPS79633&fileType=pdf, ComponentLink3Description="Package Specification", ComponentLink3URL=http://www.ti.com/litv/pdf/mpds098c, DatasheetVersion=SLVS351N, Eco-Plan="Green (RoHS & no Sb/Br)", Fixed Output Options(V)=3.3, Iout(Max)(A)=1, Iq(Typ)(mA)=0.26, Mounting Technology="Surface Mount", PackageDescription="6-Pin Plastic Small Outline, Body 3.5 x 6.5 mm, Pitch 1.27 mm", PackageReference=DCQ0006A, PackageVersion=4202109/D, PartNumber=TPS79633DCQR, SubFamily="Single Channel LDO", Vdo(Typ)(mV)=220, Vin(Max)(V)=5.5, Vin(Min)(V)=2.7, Vout Adj(Max)(V)=3.3, Vout Adj(Min)(V)=3.3
U4: library part CMP-06325-000011-1, "IC REG BOOST ADJ 1.2A TSOT23-5", Case/Package=TSOT, Max Input Voltage=10V, Max Operating Temperature=125°C, Max Output Current=1A, Max Output Voltage=34V, Min Input Voltage=2.5V, Min Operating Temperature=-40°C, Package Quantity=3000, Switching Frequency=1.2MHz, Height=0.87mm, Lead Free="Lead Free", Length=2.9mm, Min Output Voltage=2.5V, Min Supply Voltage=2.5V, Mount="Surface Mount", Number of Outputs=1, Number of Pins=5, Operating Supply Voltage=10V, Output Configuration=Positive, Output Current=1A, Output Type=Adjustable, Output Voltage=34V, Packaging="Tape and Reel", Radiation Hardening=No, REACH SVHC="No SVHC", Synchronous Rectifier=No, Topology=Boost, Width=1.6mm
U5: library part CMP-12153-000005-1, "IC REG LINEAR 5V 1.2A SOT223", Dropout Voltage=350mV, Manufacturer=STMicroelectronics, Max Junction Temp=+150°C, Max Supply Voltage=18V, Min Supply Voltage=2.6V, Nominal Supply Current=250uA, Output Current=2A, Output Voltage=5V, Package=SOT-223-0046067_14, Temperature="-40°C to +125°C", Temperature Range High=+125°C, Temperature Range Low=-40°C, Accuracy Percentage=2%, Automotive=No, Category=IC, ComponentLink2Description=Datasheet, ComponentLink2URL=https://www.st.com/content/ccc/resource/technical/document/datasheet/group3/0e/5a/00/ca/10/1a/4f/a5/DM00366442/files/DM00366442.pdf/jcr:content/translations/en.DM00366442.pdf, Device Class L1="Integrated Circuits (ICs)", Device Class L2="Power Management ICs", Device Class L3="Voltage Regulators - Linear", Digikey Description="IC REG LINEAR 5V 1.2A SOT223", Height=1.9mm, Lead Free=Yes, Manufacturer Part Number=LDL1117S50R, Mouser Description="LDL1117 Series 1.2 A 5 V High PSRR LDO Linear Voltage Regulator - SOT-223", Number of Outputs=1, Octopart=https://octopart.com/ldl1117s50r-stmicroelectronics-81876164, Output Type=Fixed, RoHS=TRUE, Standoff Height=0.02mm

## Free pads (board coordinates)
  round 0 hole 125.98 unplated: 3(131.89,131.89) ""(131.89,2171.26) ""(1948.11,131.89) ""(1949,2176)

## Via types
v1: diameter 47.24, hole 19.68, Top Layer to Bottom Layer, 39 vias
v2: diameter 20, hole 10, Top Layer to Bottom Layer, tented bottom, 4 vias

## Nets (pads, with @x,y where several pads share a name; then routed paths per layer and width w, separated by ;. In a path a pad name is that pad's centre, name@x,y a point inside that pad or via, vN(x,y) a via of type N, cw(c..) or ccw(c..) an arc to the next point about the centre after c; other vN are vias at no path point)
3.3_Load: P2.5 P3.2 | length 1007
  Bottom Layer w20: P2.5 326,1429 274,1481 274,1691 555,1972 555,2093 626.43,2164.43 P3.2
3.3_Vout: C7.1 P3.1 U3.4 | length 2711.2
  Top Layer w10: C7.1 C7.1@292.06,218
  Top Layer w20: C7.1 227,218 135,310 135,1620 309,1794 607,1794 710,1897 710,2096 778.43,2164.43 P3.1 ; C7.1@292.06,218 341.06,267 U3.4
5_Load: P2.3 P3.5 | length 730
  Bottom Layer w20: P2.3 360,1529 342,1547 342,1672 630.52,1960.52 P3.5
5_Vout: C11.1 P3.4 U5.2 U5.4 | length 1318.5
  Top Layer w10: C11.1 C11.1@809.03,1342.03
  Top Layer w20: P3.4 788,1860 696,1768 696,1378 735,1339 C11.1 ; C11.1@809.03,1342.03 U5.4 U5.2
6_Vout: C9.1 C10.1 D3.1 R12.2 U5.3 | length 1144.5
  Top Layer w10: U5.3@1060,1643.55 U5.3 ; C9.1@1357.92,2133.37 C9.1 ; D3.1@1588.44,1931 D3.1
  Top Layer w20: U5.3 1061,2052 1142.37,2133.37 C10.1 C9.1@1357.92,2133.37 ; C9.1 1358.55,2080.45 1463.15,1975.85 R12.2 D3.1@1588.44,1931
Battery+: C1.1 C5.1 C8.1 L1.1 P1.1 R8.2 U1.2 U1.3 U1.5 U3.1 U3.2 U4.4 U4.5 | length 1903.8
  Top Layer w10: v1(277,417) v1@277.57,417.57 ; C5.1@374.43,417.57 C5.1 C5.1@375.57,417.57 ; U3.1@482.12,417.57 U3.1 ; C1.1 C1.1@1299.26,604.19 ; C8.1@1322.45,1681 C8.1 ; U4.4@1408.75,1680.45 U4.4 ; 1459.47,786 1459.79,786.32 1478.13,786.32 1484.07,792.25 1484.07,794.76 1484.15,794.84 U1.2 U1.3 ; U1.5 1516.47,707.53 1517,707 ; L1.1@1600,1680 L1.1
  Top Layer w15: 1484.26,674.26 1517,707
  Top Layer w20: v1@277.57,417.57 C5.1@374.43,417.57 ; C5.1@375.57,417.57 U3.1@482.12,417.57 ; U3.2 U3.1 ; R8.2 1045,653.01 1045,613 1220,438 P1.1 ; v1(1212,1681) C8.1@1322.45,1681 ; C1.1 1298.45,666.45 1418,786 1459.47,786 ; C1.1@1299.26,604.19 P1.1 ; C8.1 U4.4@1408.75,1680.45 ; U4.4 U4.5 L1.1@1600,1680 ; 1484.26,674.26 1484.26,623 P1.1
Battery-: C1.2 C2.2 C3.2 C4.2 C5.2 C6.2 C7.2 C8.2 C9.2 C10.2 C11.2 J1.1 J1.2 J1.3 J1.4 J1.A12 J1.B12 P1.2 P2.1 P2.2 P2.8 P2.14 P2.20 Q1.1 Q2.1 R1.2 R2.1 R3.1 R4.1 R5.1 R9.1 R13.2 U1.4 U1.6 U1.8 U1.15 U1.17@1546,785 U2.4 U3.3 U3.6 U4.2 U5.1 | length 2747.8
  Top Layer w10: v1(276,322) v1@278.5,319.5 ; C5.2@374,490 C5.2 ; C6.2@390,169 C6.2 ; U3.3@480.18,319.5 U3.3 ; U3.6 U3.6@715,319 ; C11.2@804,1273.55 C11.2 ; v1(1003,781) v1@1013.08,781 ; 1033.08,801 U2.4 ; U5.1 U5.1@1063,1459.45 ; R9.1 R9.1@1188.09,918.09 ; C4.2 C4.2@1207,716.94 ; v1@1251.91,918.09 v1(1252,918) ; C8.2 C8.2@1324,1616 ; R13.2 R13.2@1332,1877 ; v1(1441,694) v1@1448.13,701.13 ; U4.2@1446.3,1783.84 U4.2 ; 1472,755 1472.39,755.39 1490.8,755.39 U1.4 U1.4@1484.15,755.47 ; R2.1@1523,1033.87 R2.1 ; v1(1534,646) 1537,649 1537,715.28 1536.24,716.05 1536.24,729.8 U1.6 ; 1536.08,853.92 1536.08,840.2 U1.15 ; U1.8 1590.88,729.88 1591,730 ; v1@1643.92,708 v1(1654,708) ; R1.2@1663.94,1389 R1.2 ; C3.2@1710,476 C3.2 ; R3.1 R3.1@1802.63,778 ; J1.A12@1827.95,1520 J1.A12
  Top Layer w15: v1(1494,896) 1536.08,853.92
  Top Layer w20: v1@278.5,319.5 U3.3@480.18,319.5 ; C7.2 292,167.63 292,106 v1(293,105) ; C5.2@374,490 v1(374,561) ; v1(390,105) C6.2@390,169 ; v1(657.61,939.5) 657.61,973.5 675.12,991 Q1.1 ; U3.6@715,319 v1(807,319) ; C11.2@804,1273.55 805.78,1271.78 898.22,1271.78 v1(902,1268) ; v1(841.61,931.5) 846.83,936.71 846.83,960.35 876.23,989.76 Q2.1 ; v1@1013.08,781 1033.08,801 ; v1(1063,1396) U5.1@1063,1459.45 ; v1(1155,605) C1.2 ; R9.1@1188.09,918.09 v1@1251.91,918.09 ; C4.2@1207,716.94 1207,721.74 1206.03,722.72 1206.03,770.66 1230,794.63 v1(1230,802) ; v1(1209,2025) C10.2 ; v1(1302,743) R5.1 ; v1(1324,1537) C8.2@1324,1616 ; v1(1332,1819) R13.2@1332,1877 ; R4.1 v1(1413,1043) ; C9.2 v1(1504.55,2134) ; U4.2@1446.3,1783.84 1446.3,1830.3 v1(1484,1868) ; v1@1448.13,701.13 1448.13,731.13 1472,755 ; R2.1@1523,1033.87 v1(1523,1098) ; 1591,730 1621.92,730 v1@1643.92,708 ; v1(1597,1389) R1.2@1663.94,1389 ; v1(1600,1300) 1601.21,1301.21 1827.79,1301.21 J1.B12 ; C2.2 v1(1748,920) ; C3.2@1710,476 v1(1710,554) ; v1(1729,1578) 1787,1520 J1.A12@1827.95,1520 ; R3.1@1802.63,778 v1(1888,778)
  other v2: 1526.32,765.32 1565.68,765.32 1526.32,804.68 1565.68,804.68
CHG: D2.1 U1.9 | length 773.2
  Top Layer w15: U1.9 1601.38,755.74 1718.74,755.74 v1(1719,756)
  Top Layer w20: v1(1925,327) 1967,327 1991,351 D2.1
  Bottom Layer w10: v1@1923,329 v1(1925,327)
  Bottom Layer w20: v1(1719,756) 1925,550 v1(1925,327)
Cout: R11.1 U2.2 | length 95
  Top Layer w10: 1096,873 1097.09,871.91 1097.09,848.75 U2.2
  Top Layer w20: 1096,873 R11.1
ILIM: R3.2 U1.12 | length 218
  Top Layer w10: U1.12 1622.21,814.53 1644.43,836.74 1644.74,836.74
  Top Layer w20: 1644.74,836.74 1666.37,858.37 R3.2
ISET: R4.2 U1.16 | length 134.3
  Top Layer w10: R4.2@1407.09,900.32 R4.2 R4.2@1418.91,900.32 ; 1503.88,840.12 U1.16
  Top Layer w20: R4.2@1418.91,900.32 1479.11,840.12 1503.88,840.12
NetC3_1: C3.1 R6.2 R7.2 U1.10 U1.11 | length 1409
  Top Layer w10: U1.10 U1.11 ; 1657.76,794.84 1673.92,811 v1(1684,811) ; R7.2@1798.56,411.55 R7.2
  Top Layer w13: U1.11 1657.76,794.84
  Top Layer w20: R7.2@1798.56,411.55 C3.1 1711,353 1815,249 v1(1993,249) ; R7.2 R6.2
  Bottom Layer w10: v1(1993,249) v1@1999,255
  Bottom Layer w20: v1(1684,811) 1737,811 1993,555 v1(1993,249)
NetC4_1: C4.1 R8.1 U2.5 | length 221.1
  Top Layer w10: 1097.32,770.68 U2.5 ; C4.1@1144,717 C4.1
  Top Layer w20: R8.1 C4.1@1144,717 ; 1097.32,770.68 1108,760 1132,760 1146,746 C4.1
NetC6_1: C6.1 U3.5 | length 91.8
  Top Layer w10: C6.1 C6.1@391.38,217
  Top Layer w20: C6.1@391.38,217 U3.5
NetD1_2: D1.2 R6.1 | length 64
  Top Layer w20: R6.1 D1.2
NetD2_2: D2.2 R7.1 | length 65
  Top Layer w20: R7.1 D2.2
NetD3_2: D3.2 L1.2 U4.1 | length 213.1
  Top Layer w10: L1.2@1601.07,1783.54 L1.2 ; D3.2@1609,1859 D3.2
  Top Layer w20: U4.1 L1.2@1601.07,1783.54 ; L1.2 D3.2@1609,1859
NetJ1_A5: J1.A5 R1.1 | length 105.4
  Top Layer w10: R1.1 R1.1@1725,1391
  Top Layer w20: R1.1@1725,1391 J1.A5
NetQ1_4: Q1.4 R10.1 | length 145
  Top Layer w10: R10.1 R10.1@789,847.61
  Top Layer w20: R10.1@789,847.61 Q1.4
NetQ1_5-6-7-8: Q1.5-6-7-8 Q2.5-6-7-8 | length 164.4
  Top Layer w10: Q1.5-6-7-8 Q1.5-6-7-8@741.25,1064.32 ; Q2.5-6-7-8@904.25,1064.32 Q2.5-6-7-8
  Top Layer w20: Q1.5-6-7-8@741.25,1064.32 Q2.5-6-7-8@904.25,1064.32
NetQ2_4: Q2.4 R11.2 | length 206.6
  Top Layer w20: Q2.4 996,992 1020,1016 1020,1059 1045.73,1084.73 R11.2
NetR5_2: R5.2 U1.1 | length 128.1
  Top Layer w10: R5.2 R5.2@1363.39,814.61 ; U1.1@1490.8,814.61 U1.1
  Top Layer w15: R5.2@1363.39,814.61 U1.1@1490.8,814.61
NetR9_2: R9.2 U2.6 | length 111.8
  Top Layer w10: U2.6 1131,801
  Top Layer w20: 1131,801 1145,801 1188,844 R9.2
NetR10_2: R10.2 U2.3 | length 150.3
  Top Layer w10: R10.2 R10.2@930.61,845.5 ; 1056.45,846.5 1058.48,848.52 U2.3
  Top Layer w20: R10.2 1056.45,846.5
NetR12_1: R12.1 R13.1 U4.3 | length 226.9
  Top Layer w10: R12.1@1409.2,1930.2 R12.1 R12.1@1409.72,1931.28
  Top Layer w20: R13.1 R12.1@1409.72,1931.28 ; U4.3 R12.1@1409.2,1930.2
PGOOD: D1.1 U1.7 | length 574.9
  Top Layer w15: U1.7 1555.84,700.16 1608,648
  Top Layer w20: 1608,648 1907,648 1990,565 D1.1
TMR: R2.2 U1.14 | length 139.1
  Top Layer w10: R2.2 R2.2@1530.89,962 ; U1.14 1555.84,865.98
  Top Layer w15: 1555.84,865.98 1555.84,937.05
  Top Layer w20: R2.2@1530.89,962 1555.84,937.05
USB_Input: C2.1 J1.A9 J1.B9 U1.13 | length 1023.1
  Top Layer w10: U1.13 1575.53,840.92 1575.61,841 1587,841 ; C2.1 C2.1@1605,920.83 ; v1(1749,1471) v1@1749.24,1470.76 ; J1.A9@1828.76,1470.76 J1.A9 ; J1.B9 J1.B9@1830.16,1352
  Top Layer w20: 1587,841 1604.17,858.17 C2.1 ; C2.1@1605,920.83 v1(1605,996) ; v1@1749.24,1470.76 J1.A9@1828.76,1470.76 ; J1.A9 1878.47,1470.53 1891,1458 1891,1363 1880,1352 J1.B9@1830.16,1352
  Bottom Layer w10: v1@1746,1474 v1(1749,1471)
  Bottom Layer w20: v1(1605,996) 1749,1140 v1(1749,1471)
pads on no net: J1.B5 P2.4 P2.6 P2.7 P2.9 P2.10 P2.11 P2.12 P2.13 P2.15 P2.16 P2.17 P2.18 P2.19 P3.3 P3.6 P3.7 P3.8 Q1.2 Q1.3 Q2.2 Q2.3 U1.17@1546,785 U2.1

## Polygon pours and split planes (outlines as drawn)
Battery- on Battery- (split plane): 2059.9,20.1 20.1,20.1 20.1,2283.05 2059.9,2283.05
Battery+ on Battery+ (split plane): 2059.9,20.1 20.1,20.1 20.1,2283.05 2059.9,2283.05

## Silkscreen, mask and mechanical layers (free items; w line width, h text height)
Top Overlay:
  the board outline again, w3.94

## Text inside footprints (layer, text, board x,y; h text height)
L1: Top Overlay "1" at 1692.03,1687.03 h11.81 r180